# Altium PCB Rajesh_Jasti_17978253_Lab_1.PcbDoc
Units mil, origin at the board's own origin, x right, y up, seen from the top; angles counter-clockwise.
Board outline 2716.51 x 1673.2 mil, 2 copper layers (Top Layer, Bottom Layer); 24 components, 10 nets, 44 pads, 0 vias.
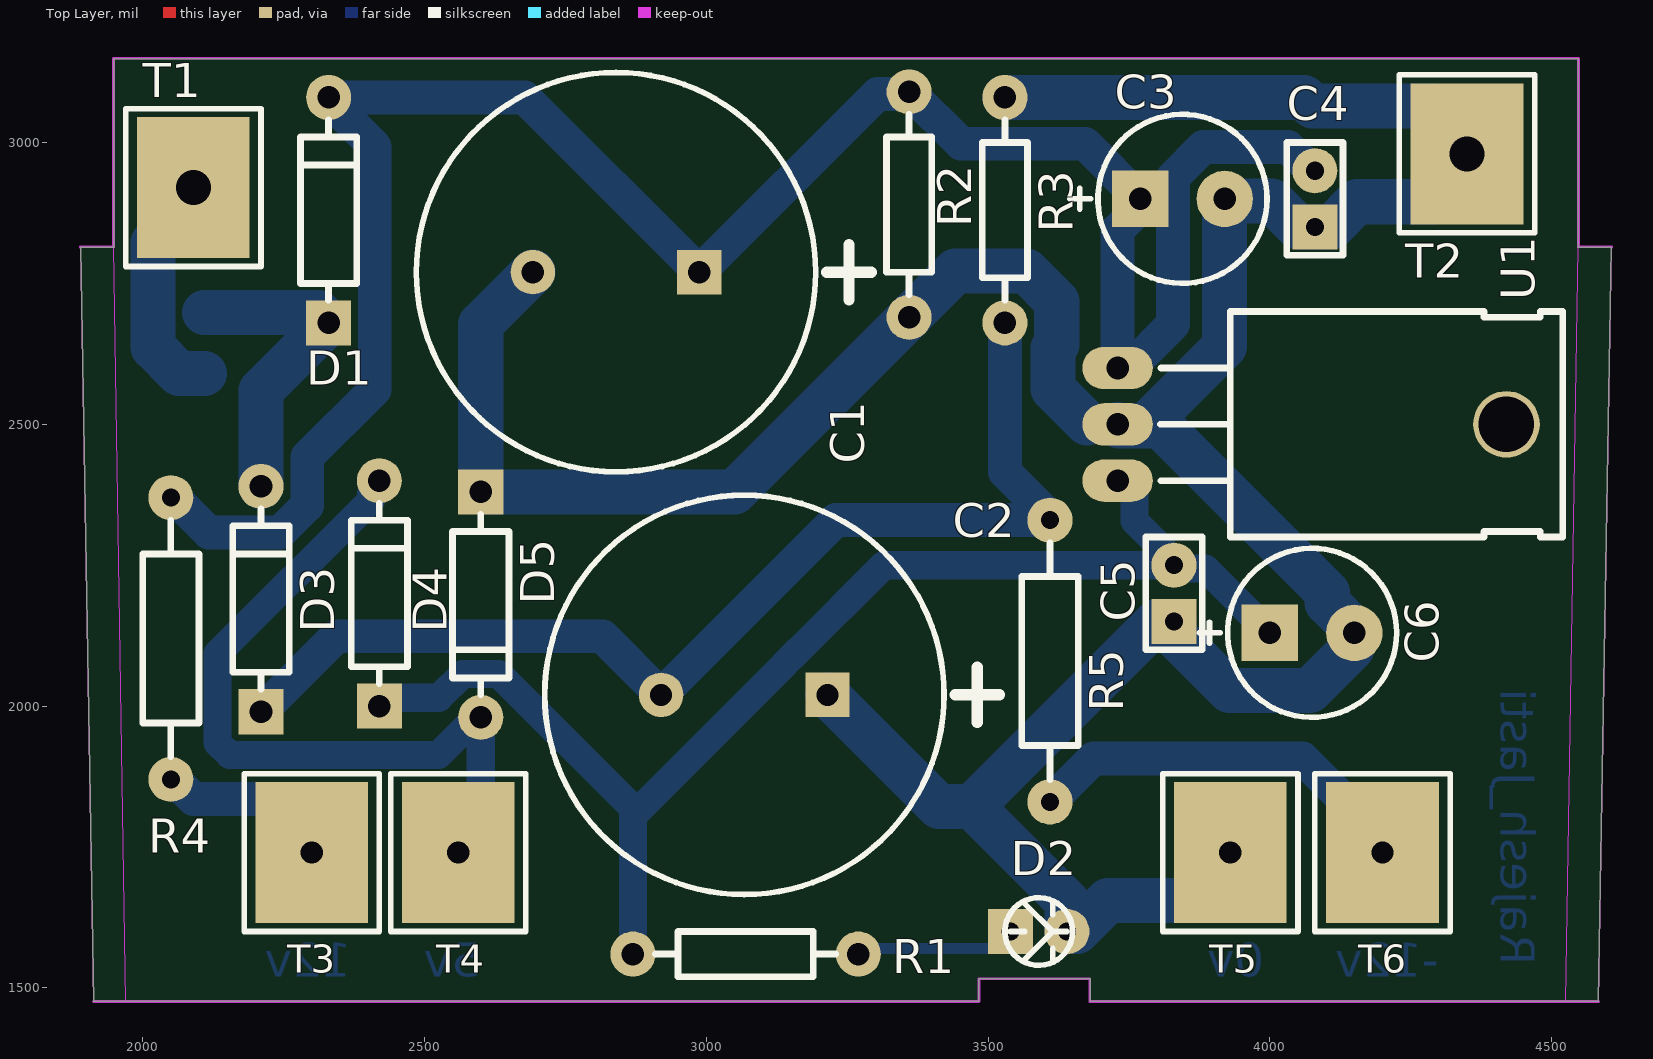
[diagram p0: Top Layer view]
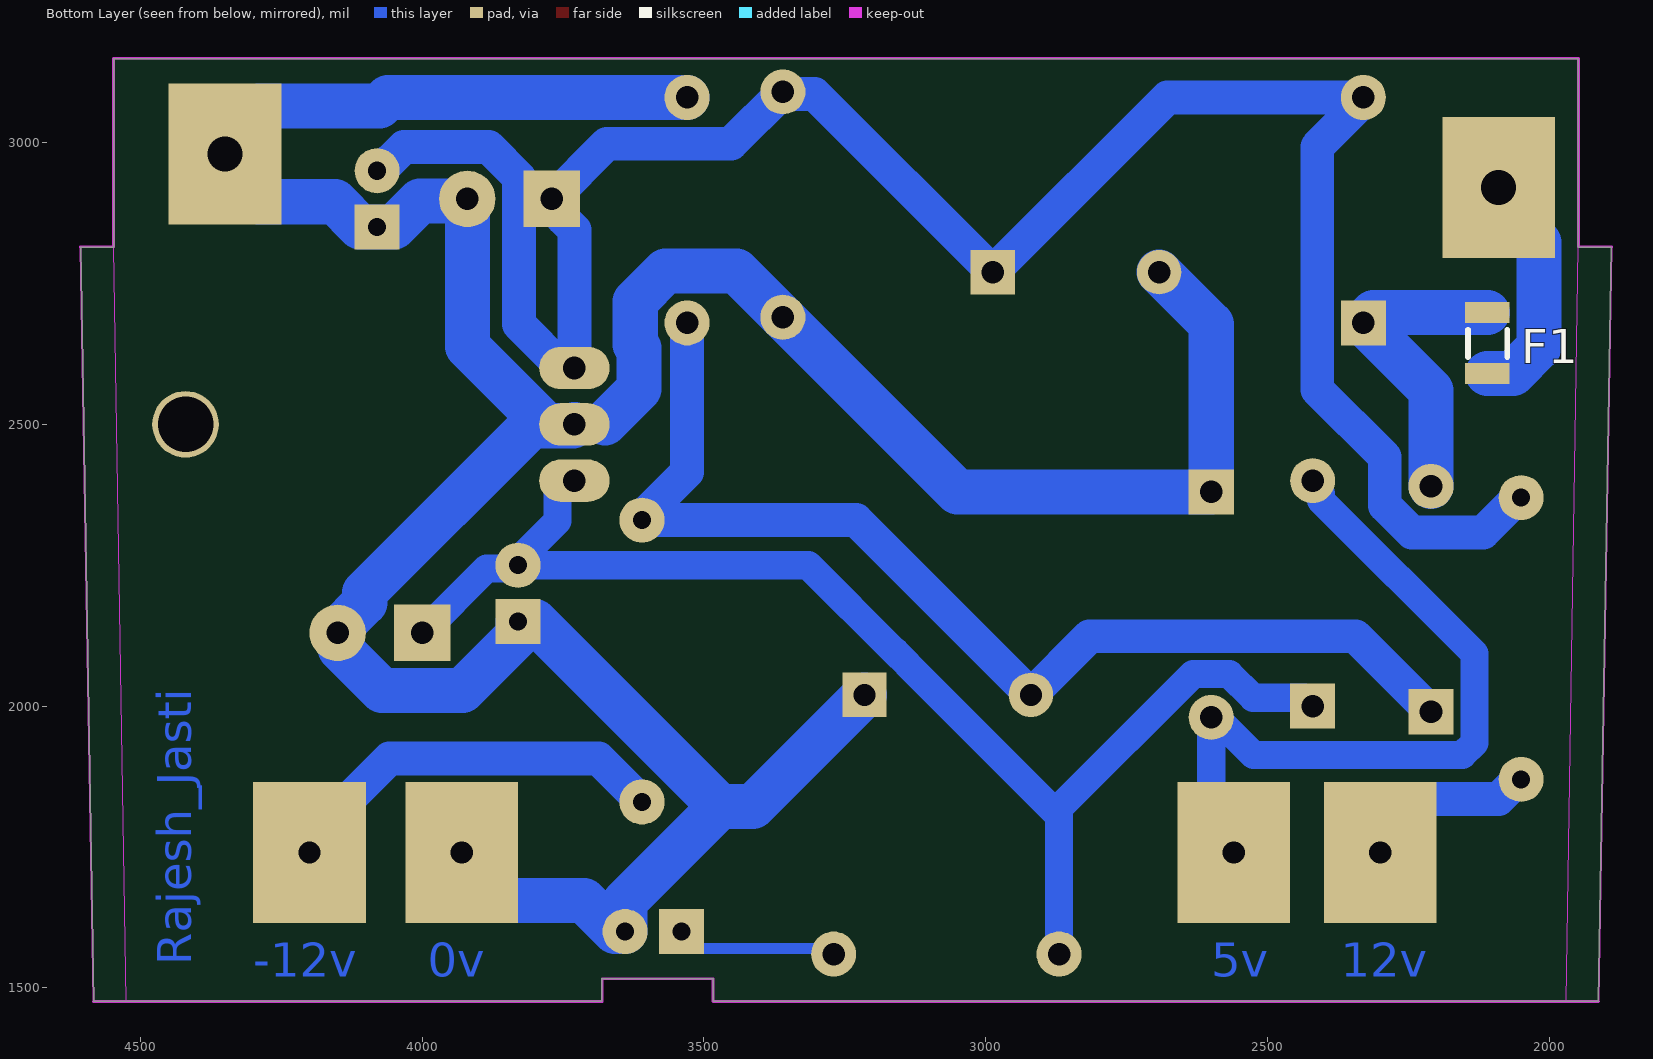
[diagram p1: Bottom Layer view, seen from below]
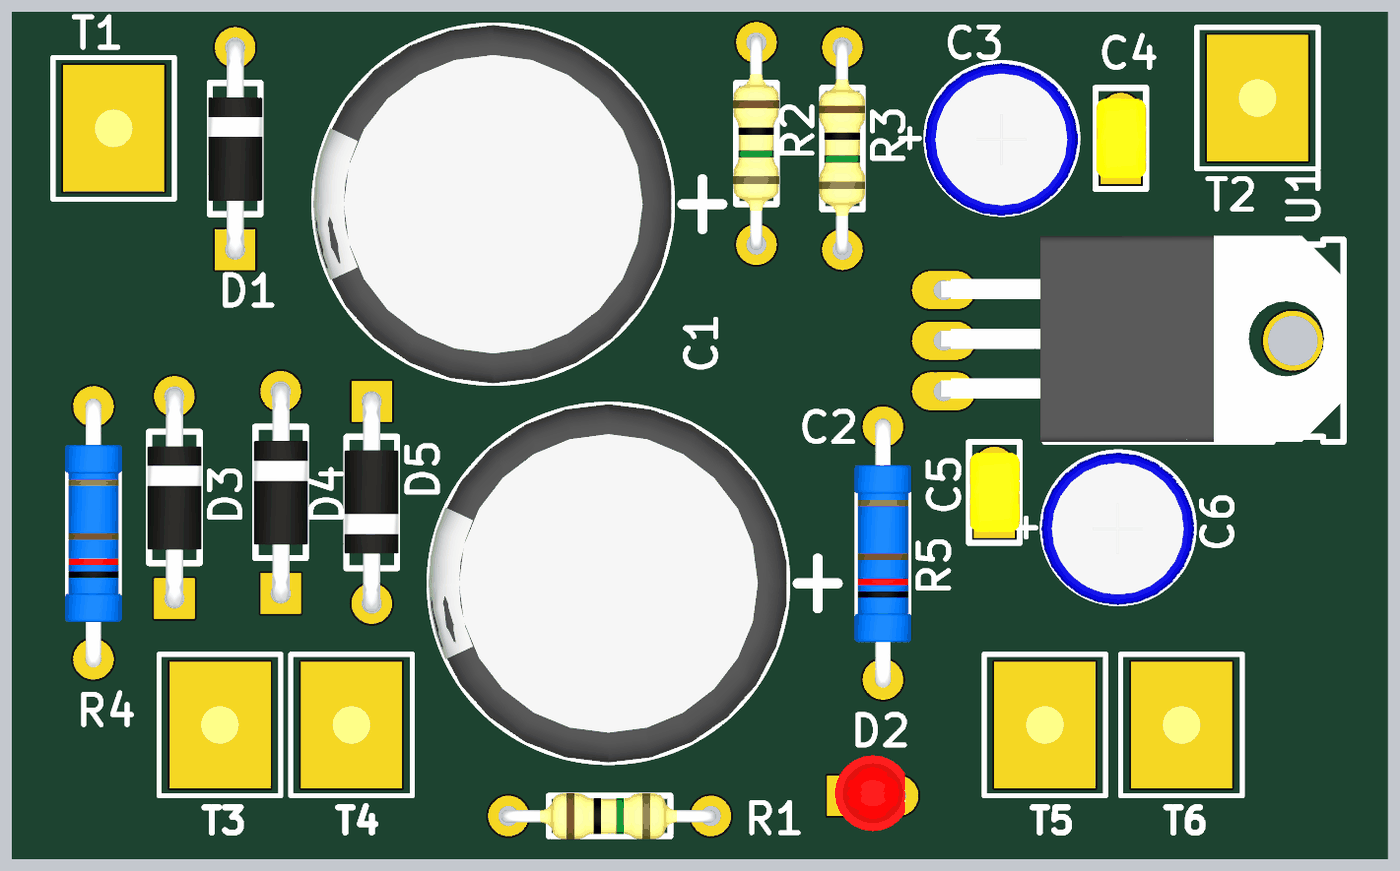
[diagram p2: 3D render of the assembled board from above, using the file's embedded part models]

## Layer stack, top to bottom
Top Solder: solder mask 0.4, Solder Resist, Dk 3.5
Top Layer: signal copper 1.4
Dielectric 1: dielectric 12.6, FR-4, Dk 4.8
Bottom Layer: signal copper 1.4
Bottom Solder: solder mask 0.4, Solder Resist, Dk 3.5

## Board outline
1913.14,1475.89 1889.78,2814.45 cw(c1889.76,2814.96) 1889.78,2814.45 ccw(c1889.26,2814.45) 1889.78,2814.45 cw(c1889.76,2814.96) 1889.78,2814.45 cw(c1889.26,2814.45) 1889.78,2814.45 ccw(c1889.26,2814.45) 1889.78,2814.45 cw(c1889.76,2814.96) 1889.78,2814.45 cw(c1889.26,2814.46) 1889.78,2814.45 1948.32,2814.45 ccw(c1948.32,2814.96) 1948.83,2814.96 1948.83,3149.09 cw(c1948.82,3149.61) 1948.83,3149.09 cw(c1948.32,3149.11) 1948.83,3149.09 4547.23,3149.09 cw(c4547.75,3149.11) 4547.23,3149.09 cw(c4547.24,3149.61) 4547.23,3149.09 4547.23,2814.96 ccw(c4547.75,2814.96) 4547.75,2814.45 4606.29,2814.45 cw(c4606.8,2814.46) 4606.29,2814.45 cw(c4606.3,2814.96) 4606.29,2814.45 cw(c4606.3,2814.96) 4606.28,2814.45 cw(c4606.3,2814.96) 4606.28,2814.45 cw(c4606.3,2814.96) 4606.28,2814.45 4582.92,1475.9 4582.92,1475.89 cw(c4582.93,1475.38) 4582.92,1475.89 cw(c4582.93,1475.38) 4582.92,1475.89 cw(c4583.44,1475.86) 4582.92,1475.89 3681.62,1475.89 3681.62,1515.75 ccw(c3681.1,1515.75) 3681.1,1516.26 3484.25,1516.26 ccw(c3484.25,1515.75) 3483.74,1515.75 3483.74,1475.89

## Design rules (kind name [scope] priority, off if disabled: settings)
Clearance [All] p1: gap=12 ignorepadtopadclearanceinfootprint=FALSE
Height [All] p1: minheight=0 maxheight=20000 prefheight=500
PolygonConnect [All] p1: connectstyle=Relief reliefconductorwidth=10 reliefentries=4 polygonreliefangle="90 Angle" airgapwidth=10
RoutingVias [All] p1: holewidth=28 width=50 viastyle="Through Hole" minholewidth=28 minwidth=50 maxholewidth=28 maxwidth=50
SilkToSilkClearance [All] p1 off: silktosilkclearance=10
SilkToSolderMaskClearance [IsPad] p1 off: minsilkscreentomaskgap=10 clearancetoexposedcopper=TRUE
SolderMaskExpansion [All] p1: expansion=4 istentingtop=FALSE
Width "Schematic Width Constraint_10" [InNet('NetD1_A')] p1: maxlimit=100 minlimit=60 preferedwidth=80
Width "Schematic Width Constraint_9" [InNet('-12V')] p2: maxlimit=70 minlimit=40 preferedwidth=60
Width "Schematic Width Constraint_8" [InNet('NetR5_2')] p3: maxlimit=70 minlimit=40 preferedwidth=60
Width "Schematic Width Constraint_7" [InNet('NetR4_2')] p4: maxlimit=70 minlimit=40 preferedwidth=60
Width "Schematic Width Constraint_1" [InNet('NetD4_K')] p5: maxlimit=70 minlimit=30 preferedwidth=50
Width "Schematic Width Constraint_4" [InNet('NetF1_1')] p6: maxlimit=100 minlimit=60 preferedwidth=80
Width "Schematic Width Constraint_3" [InNet('GND')] p7: maxlimit=100 minlimit=60 preferedwidth=80
Width "Schematic Width Constraint_2" [InNet('+12')] p8: maxlimit=70 minlimit=40 preferedwidth=60
Width "Schematic Width Constraint" [InNet('+5')] p9: maxlimit=70 minlimit=30 preferedwidth=50
Width [All] p10: maxlimit=40 minlimit=20 preferedwidth=20
27 further rules are at their usual default settings.

## Components (designator, comment, footprint, x,y, rotation, side; value= is the part's Value field where it differs from the comment)
C1 "10000uF" CAPP18-7.5mm 2840,2770 r180 top
C2 "10000uF" CAPP18-7.5mm 3067.64,2020 r180 top
C3 "100uF" CAPP150-300_AUT 3845,2900 r180 top
C4 "0.1uF" RAD-0.1_AUT 4080,2900 r90 top
C5 "0.1uF" RAD-0.1_AUT 3830,2200 r90 top
C6 "100uF" CAPP150-300_AUT 4075,2130 r180 top
D1 "1N4007" DIODE0.4_AUT 2330,2680 r90 top
D2 "LED-RED" LED3MM_R_AUT 3590,1600 r0 top locked
D3 "1N4007" DIODE0.4_AUT 2210,1990 r90 top
D4 "1N5819" DIODE0.4_AUT 2420,2000 r90 top
D5 "1N5819" DIODE0.4_AUT 2600,2380 r270 top
F1 "MC36207" MC36207 2110,2590 r90 bottom
R1 "330R" AXIAL-0.4AUT 3270,1560 r180 top
R2 "10k" AXIAL-0.4AUT 3360,2690 r90 top
R3 "10k" AXIAL-0.4AUT 3530,2680 r90 top
R4 "1R" AXIAL-0.5AUT 2050,2370 r270 top
R5 "1R" AXIAL-0.5AUT 3610,2330 r270 top
T1 "AC IN" PAD3_AUT#1 2090,2920 r0 top
T2 "AC IN" PAD3_AUT#1 4350,2980 r0 top
T3 "+12V DC" PAD3_AUT#2 2300,1740 r0 top locked
T4 "+5V DC" PAD3_AUT#2 2560,1740 r0 top locked
T5 "0V DC" PAD3_AUT#2 3930,1740 r0 top locked
T6 "-12V DC" PAD3_AUT#2 4200,1740 r0 top locked
U1 "L78S05CV" TO-220H 3730,2500 r270 top

## Footprints (in the part's own frame and the unit in brackets; to place one, negate y for a bottom-side part, rotate by r counter-clockwise, add the part's x,y. Pads: shape width x height; smd on the part's side, far side on the other; paste and mask are expansions set on the pad)
AXIAL-0.4AUT [mil] "2 leads, Distance 400mil. For AUT Manufacture"
  round 80 hole 40: 1(0,0) 2(400,0)
  silkscreen extent 40,-40 360,40, body extent -10,-45 414,46, height 96
AXIAL-0.5AUT [mil] "2 leads, Distance 500mil. For AUT Manufacture"
  round 80 hole 32: 1(0,0) 2(500,0)
  silkscreen extent 40,-50 460,50, body extent -14,-56 516,56, height 114
CAPP18-7.5mm [mm] "Capacitor, Dia 18mm, Pitch 7.5mm"
  rect 2x2 hole 1: 1(-3.75,0)
  round 2 hole 1: 2(3.75,0)
  silkscreen extent -11.5,-9 9,9, body extent -9,-9 9.03,9, height 35.53
CAPP150-300_AUT [mil] "Capacitor, Electrolytic, Radial, Snap-In Pins;  Pin Spacing 150 mil; Body 300mil (Dia)"
  rect 100x100 hole 40: 1(75,0)
  round 100 hole 40: 2(-75,0)
  silkscreen extent -150,-150 200,150, body extent -150,-149 152,153, height 450
DIODE0.4_AUT [mil] "Diode, Axial; Body 5.2 x 2.7 mm (LxDia. max), Pin Distance, 400mil"
  rect 80x80 hole 40: A(0,0)
  round 80 hole 40: K(400,0)
  silkscreen extent 40,-50 360,50, body extent -18,-54 416,53, height 107
LED3MM_R_AUT [mil] "Red LED; 2 Flat Leads; Body Dia 3.0 mm"
  rect 80x80 hole 32: A(-50,0)
  round 80 hole 32: K(50,0)
  silkscreen extent -60,-60 60,60, body extent -75,-70 63,80, height 256
MC36207 [mm] "FUSE, PTC RESET. 3.5x1.8x0.75mm (LxWxH)"
  rect 0.95x2 smd: 1(0,0) 2(2.75,0)
  silkscreen extent 0.75,-0.9 1.97,0.87, body extent -0.35,-0.88 3.15,0.92, height 0.75
PAD3_AUT#1 [mil] "Teminal Pad; 200 x 250 mil; Hole, 62mil"
  rect 200x250 hole 62: 1(0,0)
  silkscreen extent -120,-140 120,140, body extent -37,-37 37,37, height 181
PAD3_AUT#2 [mil] "Teminal Pad; 200 x 250 mil; Hole, 62mil"
  rect 200x250 hole 39.37: 1(0,0)
  silkscreen extent -120,-140 120,140, body extent -37,-37 37,37, height 181
RAD-0.1_AUT [mil] "Indicating Instrument; 2 Leads; Distance 100mil"
  rect 80x80 hole 32: 1(-50,0)
  round 80 hole 32: 2(50,0)
  silkscreen extent -100,-50 100,50, body extent -79,-50 79,48, height 227
TO-220H [mil] "TO, Thru-Hole, Transistor, Horizontal, Heatsink Mounted; 3 In-Line Leads; Pitch 2.54 mm"
  round 118.11 hole 98.43: 0(0,690)
  oval 75x125 hole 40: 1(-100,0) 2(0,0) 3(100,0)
  silkscreen extent -200,76 200,790, body extent -207,-6 200,786, height 173

## Part data
C1 C2: library part "CAPACITOR 10000uF", "Polarized Aluminum Capacitor, Through Hole, Pitch 7.5mml, Body 18mm(Dia)", Supplier Part Number 1=1899587, Supplier 1=Farnell
C3 C6: library part CAPP150-300, "Polarized Aluminum Capacitor, Through Hole, Pitch 150mil, Body 300mil (Dia)"
C4 C5: library part "CAPN RAD0.1", "Non Polarized Capacitor, Multilayer Ceramic Dipped Radial, Pitch 100mil"
D1 D3: "Diode, Standard, 1A, 1000v", Supplier Part Number 1=9549129, Supplier 1=Farnell
D2: library part "3mm LED-RED", "3mm RED LED, Through Hole", Supplier Part Number 1=1003207, Supplier 1=Farnell
D4 D5: "Schottky Diode, 1A,40v", Supplier Part Number 1=1017589, Supplier 1=Farnell
F1: "Fuse, PTC Reset, 200mA Hold, 400mA Tripping, 30v", Supplier Part Number 1=2366765, Supplier 1=Farnell
R1 R2 R3: library part "Resistor 1/4W", "Resistor, Through Hole, Pitch 400mil"
R4 R5: library part "Resistor 1/2W", "Resistor, Through Hole, Pitch 500mil"
T1 T2 T3 T4 T5 T6: library part Terminal3, "Terminal, Pad 200x250mil, Hole 62mil"
U1: "5V, 2A, LDO, TO-220-3", Supplier Part Number 1=9756086, Supplier 1=Farnell

## Nets (pads, with @x,y where several pads share a name; then routed paths per layer and width w, separated by ;. In a path a pad name is that pad's centre, name@x,y a point inside that pad or via, vN(x,y) a via of type N, cw(c..) or ccw(c..) an arc to the next point about the centre after c; other vN are vias at no path point)
+5: C5.2 C6.1 D4.A R1.2 U1.3 | length 2397.7
  Bottom Layer w50: D4.A 2435,2015 2526.11,2015 2568.11,2057 2631.89,2057 2870,1818.89 R1.2 ; 2870,1805 3138.91,2073.91 3138.91,2074.7 3160.58,2096.37 3161.37,2096.37 3315,2250 C5.2 ; U1.3 3748.24,2400 3759.78,2388.45 3759.78,2328.33 3830,2258.12 C5.2 ; C6.1 3885.74,2244.26 3835.74,2244.26 C5.2
+12: C1.1 C3.1 C4.2 D1.K R2.2 R4.1 U1.1 | length 3874.6
  Bottom Layer w60: R4.1 2055.41,2370 2117.41,2308 2243.97,2308 2292,2356.03 2292,2442 2412,2562 2412,2992.59 2330,3074.59 D1.K 2677.64,3080 C1.1 3303.81,3086.17 3356.17,3086.17 R2.2 3452,2998 3672,2998 C3.1 3750,2880 3750,2864.85 3730,2844.85 U1.1 3750.94,2600 3828.54,2677.59 3828.54,2807.58 3828,2808.12 3828,2938.11 3881.89,2992 4032.59,2992 4074.59,2950 C4.2
-12V: C2.2 D3.A R3.1 R5.1 | length 2010.1
  Bottom Layer w60: D3.A 2344,2124 2816,2124 C2.2 3230,2330 R5.1 3610,2335.41 3530,2415.41 R3.1
GND: C1.2 C2.1 C3.2 C4.1 C5.1 C6.2 D2.K D5.A R2.1 R3.2 T2.1 T5.1 U1.2 | length 6241.7
  Bottom Layer w80: C1.2 2600,2677.64 D5.A 3050,2380 3442,2772 3568.11,2772 3622,2718.11 3622,2641.89 3615.5,2635.39 3615.5,2562.93 U1.2@3675.93,2502.5 ; C2.1 3413.45,1821.82 3471.72,1821.82 ; R3.2 4060.55,3080 4075.55,3065 4290,3065 4350,3005 4350,2955 4290,2895 4155.11,2895 4110.11,2850 4049.89,2850 4003.72,2896.17 3923.83,2896.17 C3.2 3920,2638.43 U1.2@3784.07,2502.5 ; U1.2 3732.5,2497.5 3806.04,2497.5 4102,2201.54 4102,2183.41 4150,2135.41 C6.2 4146.17,2126.17 4146.17,2102.63 4071.54,2028 3928.46,2028 3830,2126.46 C5.1 3799.89,2150 3471.72,1821.82 ; T5.1 3930,1715 3870,1655 3712.94,1655 3657.94,1600 D2.K 3640,1653.54 3471.72,1821.82
NetD1_A: D1.A D3.K F1.2 | length 567.3
  Bottom Layer w80: F1.2 2311.73,2698.27 D1.A 2210,2560 D3.K
NetD2_A: D2.A R1.1 | length 286.6
  Bottom Layer w20: R1.1 3280,1570 3510,1570 D2.A
NetD4_K: D4.K D5.K T4.1 | length 1344.5
  Bottom Layer w50: D4.K 2420,2391.88 2405,2376.88 2405,2365 2133,2093 2133,1934.67 2154.67,1913 2524.88,1913 2591.88,1980 D5.K 2600,1780 T4.1
NetF1_1: F1.1 T1.1 | length 424.4
  Bottom Layer w80: T1.1 2090,2895 2018,2823 2018,2636.86 2064.86,2590 F1.1
NetR4_2: R4.2 T3.1 | length 318.5
  Bottom Layer w60: R4.2 2055.41,1870 2090.41,1835 2230,1835 2300,1765 T3.1
NetR5_2: R5.2 T6.1 | length 705.7
  Bottom Layer w60: R5.2 3687,1907 4058,1907 4200,1765 T6.1
pads on no net: U1.0

## Keep-outs
Keep-Out Layer:
  region: 4547.24,2814.46 4606.3,2814.46 4606.3,2813.95 4582.93,1475.38 4525.56,1475.38
  region: 1948.32,2814.96 1889.26,2814.96 1889.26,2814.45 1912.63,1475.87 1970,1475.87
  lines w1: 4583.44,1475.87 4606.8,2814.45
  lines w5: 1889.26,2814.45 1889.76,2814.96 1948.32,2814.96 1948.32,3149.11 1948.82,3149.61 4547.24,3149.61 4547.75,3149.11 4547.75,2814.96 4606.3,2814.96 4606.8,2814.45 ; 1912.63,1475.87 3483.75,1475.87 ; 3483.75,1476.88 3483.75,1516.25 3680.6,1516.25 3680.6,1475.87 4582.43,1475.87 ; 4582.93,1475.38 4583.44,1475.87

## Other copper
Bottom Layer:
  text "Rajesh_Jasti" at 4409.99,1540 h60 r270
  text "12v" at 2370,1520 h60
  text "5v" at 2600,1520 h60
  text "0v" at 3990,1520 h60
  text "-12v" at 4300,1520 h60

## Silkscreen, mask and mechanical layers (free items; w line width, h text height)
Mechanical 1:
  lines w5: 4583.44,1475.88 cw(c4582.93,1475.88) 4583.44,1475.87 ; 1889.26,2814.46 cw(c1889.76,2814.46) 1889.76,2814.96 ; 1889.26,2814.46 ccw(c1889.76,2814.46) 1889.26,2814.45 ; 1889.26,2814.45 cw(c1889.76,2814.46) 1889.76,2814.96 ; 1889.26,2814.45 1889.26,2814.45 ; 1889.26,2814.46 1889.26,2814.45 ; 1889.26,2814.45 1912.63,1475.86 ccw(c1913.13,1475.88) 1913.13,1475.38 3484.25,1475.38 3484.25,1476.38 3484.25,1515.75 3681.1,1515.75 3681.1,1475.38 4582.93,1475.38 ; 1889.76,2814.96 1948.32,2814.96 1948.32,3149.11 ; 1948.32,3149.11 cw(c1948.82,3149.11) 1948.82,3149.61 ; 1948.32,3149.11 cw(c1948.82,3149.11) 1948.82,3149.61 ; 1948.82,3149.61 4547.24,3149.61 ; 4547.24,3149.61 cw(c4547.24,3149.11) 4547.75,3149.11 ; 4547.24,3149.61 cw(c4547.24,3149.11) 4547.75,3149.11 ; 4547.75,3149.11 4547.75,2814.96 4606.3,2814.96 ; 4582.93,1475.38 ccw(c4582.93,1475.88) 4583.44,1475.87 ; 4582.93,1475.38 ccw(c4582.93,1475.88) 4583.44,1475.86 ; 4583.44,1475.86 ccw(c4582.93,1475.88) 4583.44,1475.87 ; 4583.44,1475.86 4583.44,1475.87 ; 4583.44,1475.87 4583.44,1475.87 ; 4583.44,1475.87 4606.8,2814.45 ; 4606.3,2814.96 cw(c4606.3,2814.46) 4606.8,2814.46 ; 4606.3,2814.96 cw(c4606.3,2814.46) 4606.8,2814.46 ; 4606.8,2814.45 ccw(c4606.3,2814.46) 4606.8,2814.46 ; 4606.8,2814.46 ccw(c4606.3,2814.46) 4606.8,2814.46 ; 4606.8,2814.45 ccw(c4606.3,2814.46) 4606.8,2814.46 ; 4606.8,2814.45 4606.8,2814.45 ; 4606.8,2814.45 4606.8,2814.46